# Altium PCB ST_Link.PcbDoc
Units mm, origin at the board's own origin, x right, y up, seen from the top; angles counter-clockwise.
Board outline 28.77 x 54.15 mm, 2 copper layers (Top Layer, Bottom Layer), stack 1.671 mm thick; 41 components, 37 nets, 179 pads, 48 vias.
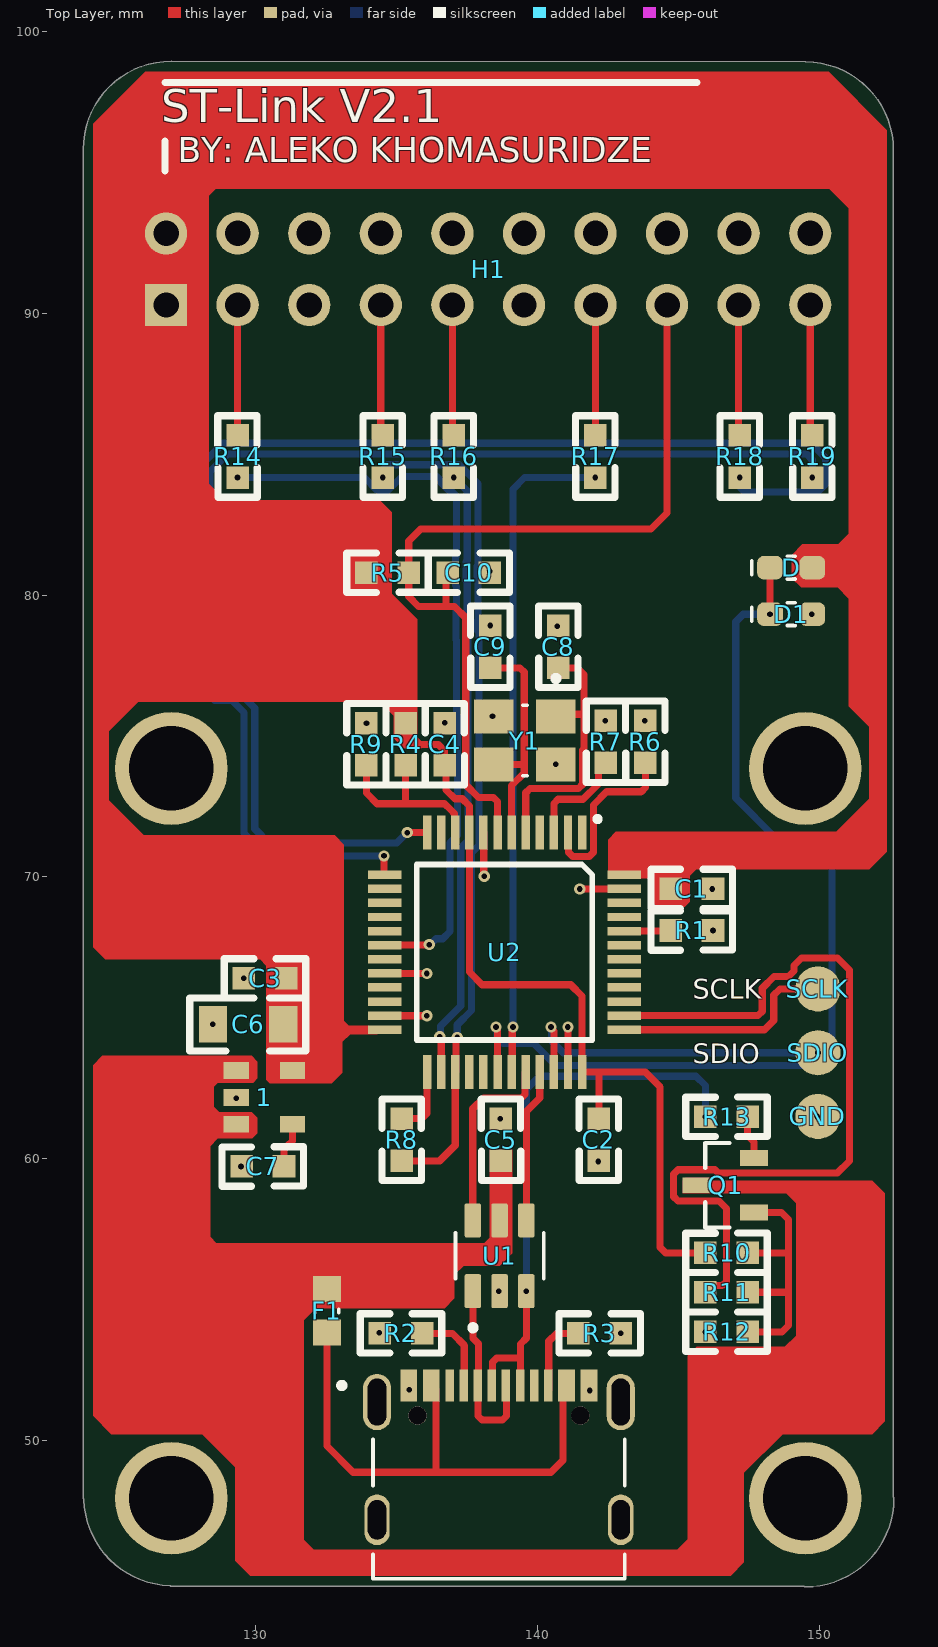
[diagram p0: Top Layer view]
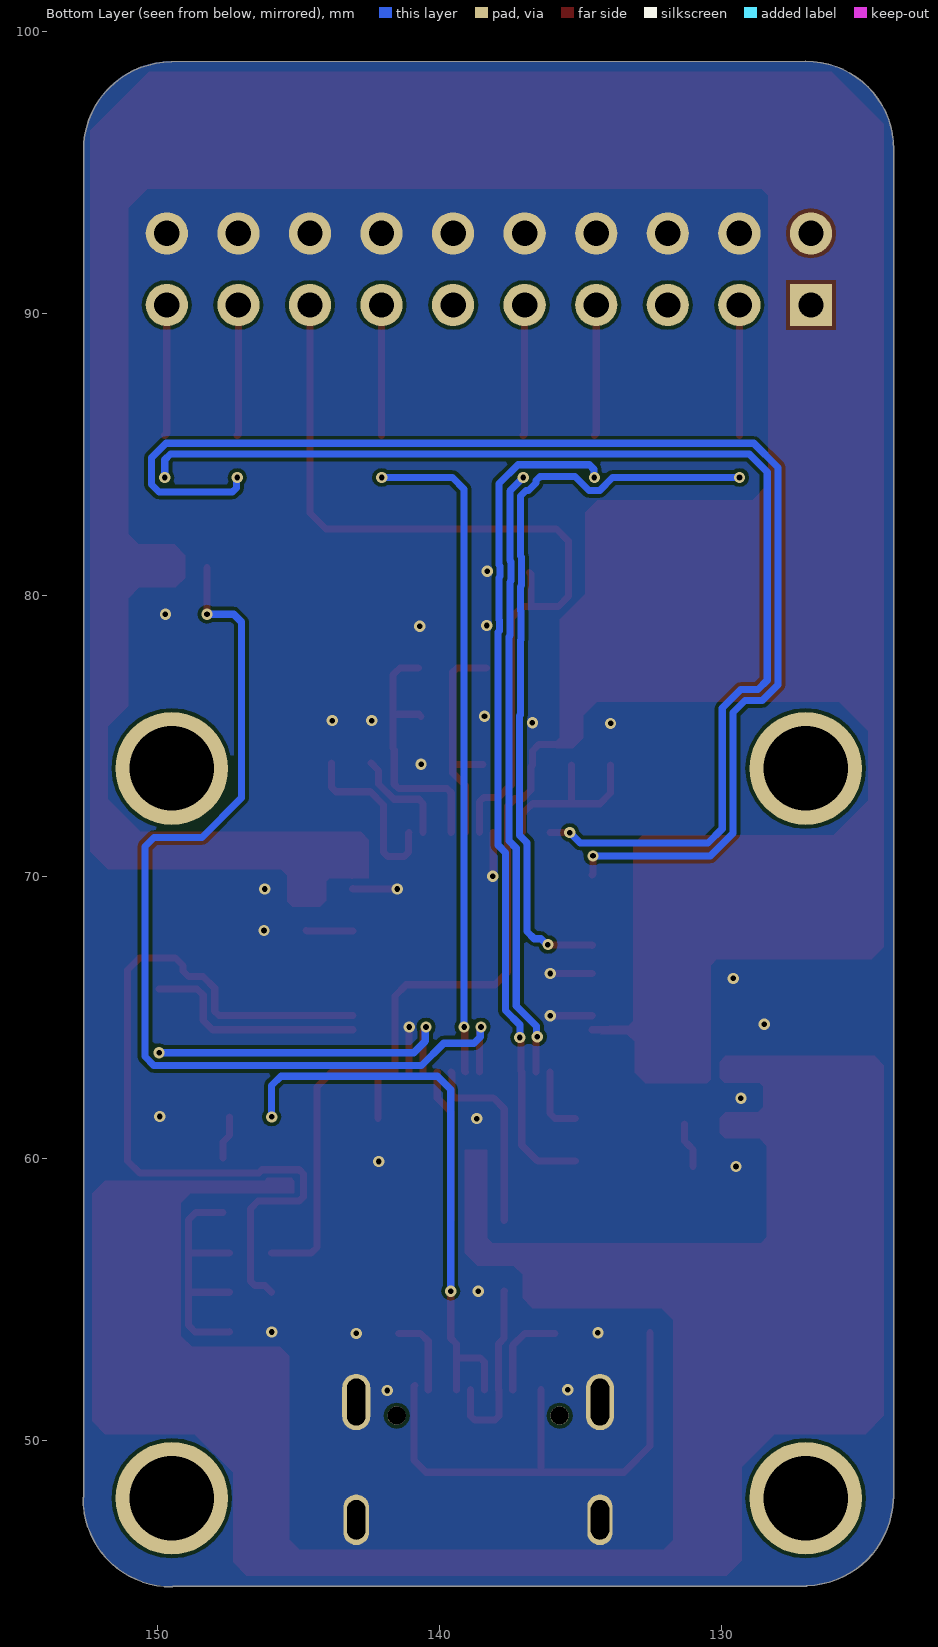
[diagram p1: Bottom Layer view, seen from below]
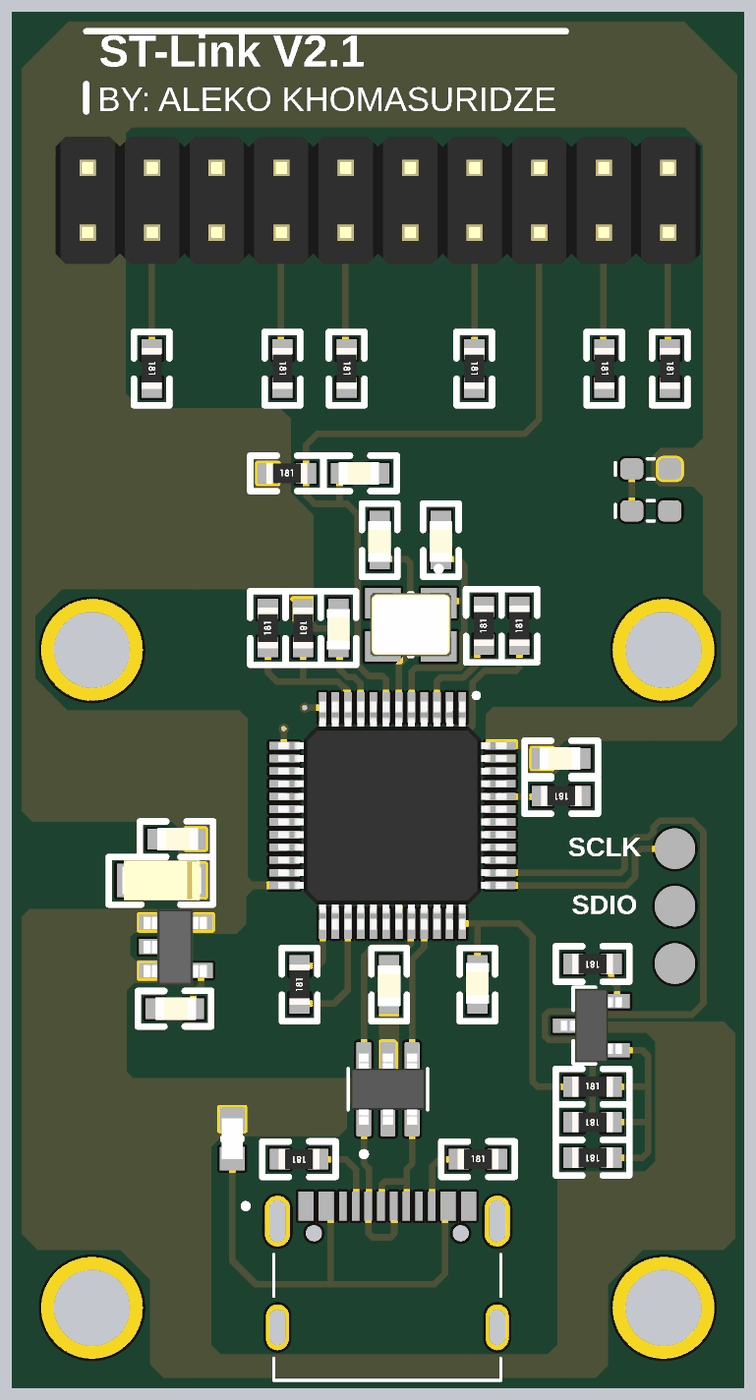
[diagram p2: 3D render of the assembled board from above, using the file's embedded part models]

## Layer stack, top to bottom
Top Solder: solder mask 0.0102, Solder Resist, Dk 3.5
Top Layer: signal copper 0.0356
Dielectric 1: dielectric 1.6, FR-4, Dk 4.8
Bottom Layer: signal copper 0.0356
Bottom Solder: solder mask 0.0102, Solder Resist, Dk 3.5

## Board outline
123.901,47.897 cw(c124,47.977) 123.873,47.977 123.873,95.825 cw(c124,95.825) 123.873,95.826 cw(c127,95.825) 127,98.952 cw(c127,98.825) 127.018,98.951 149.5,98.929 cw(c149.5,98.802) 149.521,98.927 cw(c149.5,95.8) 152.627,95.8 cw(c152.5,95.8) 152.627,95.799 152.627,47.996 cw(c152.516,47.934) 152.643,47.934 cw(c149.516,47.934) 149.516,44.807 cw(c149.516,44.934) 149.454,44.823 127.027,44.823 cw(c127.027,44.95) 126.947,44.851 cw(c127.027,47.977)

## Design rules (kind name [scope] priority, off if disabled: settings)
Clearance [All] p1: gap=0.127 ignorepadtopadclearanceinfootprint=FALSE except(0: Arc-Hole Track-Hole SMDPad-Hole THPad-Hole Via-Hole Fill-Hole Poly-Hole Region-Hole Text-Hole)
PolygonConnect [All] p1: connectstyle=Direct reliefconductorwidth=0.254 reliefentries=4 polygonreliefangle="90 Angle" airgapwidth=0.254
RoutingVias [All] p1: holewidth=0.711 width=1.27 viastyle="Through Hole" minholewidth=0.711 minwidth=1.27 maxholewidth=0.711 maxwidth=1.27
SolderMaskExpansion [All] p1: expansion=0.102 istentingtop=FALSE
Width [All] p1: maxlimit=0.254 minlimit=0.254 preferedwidth=0.254
30 further rules are at their usual default settings.

## Components (designator, comment, footprint, x,y, rotation, side; value= is the part's Value field where it differs from the comment)
1 "3.3v reg" "3.3v reg" 129.3,63.125 r270 top
C1 "100nf" "0603 CAP" 146.225,69.575 r180 top
C2 "100nf" "0603 CAP" 142.175,59.925 r90 top
C3 "100nf" "0603 CAP" 129.575,66.4 r0 top
C4 "0603 CAP" "0603 CAP" 136.7,75.463 r270 top
C5 "0603 CAP" "0603 CAP" 138.7,61.425 r270 top
C6 "2.2uF TAN CAP" "2.2uF TAN CAP" 130.975,64.775 r180 top
C7 "0603 CAP" "0603 CAP" 129.5,59.725 r0 top
C8 "22pf" "0603 CAP" 140.737,78.921 r270 top
C9 "22pf" "0603 CAP" 138.324,78.921 r270 top
C10 "100nf" "0603 CAP" 138.307,80.8 r180 top
D "BLUE" LEDSC160X80X70L45N 149,80.975 r0 top
D1 "GREEN" LEDSC160X80X70L45N 149,79.325 r0 top
F1 "0686F1500-01" FUSC1608X60N 132.525,54.6 r90 top
GND "PAD" PAD 149.95,61.5 r0 top
H1 "2x10 male header" "2x10 MALE HEADER - duplicate" 126.815,90.3 r90 top
Q1 "SOT23 PNP transistor" PCBComponent_1 147.816,60.598 r180 top
R1 "100k" "0603 RES" 144.725,68.1 r0 top
R2 "5.1k" "0603 RES" 134.4,53.8 r0 top
R3 "5.1k" "0603 RES" 142.95,53.8 r180 top
R4 "4k7" "0603 RES" 135.314,73.963 r90 top
R5 "100k" "0603 RES" 135.425,80.8 r180 top
R6 "10k" "0603 RES" 143.825,75.55 r270 top
R7 "10k" "0603 RES" 142.425,75.55 r270 top
R8 "100R" "0603 RES" 135.175,61.425 r270 top
R9 "4k7" "0603 RES" 133.925,75.463 r270 top
R10 "10k" "0603 RES" 147.455,56.66 r180 top
R11 "100R" "0603 RES" 145.955,55.26 r0 top
R12 "36k" "0603 RES" 145.955,53.86 r0 top
R13 "1k5" "0603 RES" 145.955,61.485 r0 top
R14 "22R" "0603 RES" 129.35,84.175 r90 top
R15 "22R" "0603 RES" 134.5,84.175 r90 top
R16 "22R" "0603 RES" 137.025,84.175 r90 top
R17 "22R" "0603 RES" 142.05,84.175 r90 top
R18 "" "0603 RES" 147.175,84.175 r90 top
R19 "22R" "0603 RES" 149.75,84.175 r90 top
SCLK "PAD" PAD 149.95,66.025 r0 top
SDIO "PAD" PAD 149.95,63.762 r0 top
U1 "USBLC6-2SC6" SOT95P280X145-6N 138.65,56.555 r90 top
U2 "STM32F103C8T6" STM32F103C8T6 141.578,71.579 r270 top
Y1 "7M25090002" XTAL_7M25090002 139.551,74.842 r270 top

## Footprints (in the part's own frame and the unit in brackets; to place one, negate y for a bottom-side part, rotate by r counter-clockwise, add the part's x,y. Pads: shape width x height; smd on the part's side, far side on the other; paste and mask are expansions set on the pad)
"2.2uF TAN CAP" [mm]
  rect 1x1.3 smd: 1(0,0) 2(2.5,0)
  silkscreen extent -0.79,-0.93 3.32,0.95, body extent -0.33,-0.8 2.77,0.8, height 1.31
"2x10 MALE HEADER - duplicate" [mm]
  rect 1.5x1.5 hole 0.9: 1(0,0)
  round 1.5 hole 0.9: 2(0,-2.54) 3(0,-5.08) 4(0,-7.62) 5(0,-10.16) 6(0,-12.7) 7(0,-15.24) 8(0,-17.78) 9(0,-20.32) 10(0,-22.86) 11(2.54,-22.86) 12(2.54,-20.32) 13(2.54,-17.78) 14(2.54,-15.24) 15(2.54,-12.7) 16(2.54,-10.16) 17(2.54,-7.62) 18(2.54,-5.08) 19(2.54,-2.54) 20(2.54,0)
  body extent -1.25,-24.14 3.75,1.26, height 10.54
"3.3v reg" [mm]
  rect 0.6x0.9 smd: 1(0,0) 2(0.95,0) 3(1.9,0) 4(1.9,2) 5(0,2)
  body extent -0.52,-0.27 2.48,2.23, height 1.1
"0603 CAP" [mm]
  rect 0.8x0.8 smd: 1(0,0) 2(1.5,0)
  silkscreen extent -0.7,-0.7 2.2,0.7, body extent 0,-0.45 1.6,0.45, height 0.8
"0603 RES" [mm]
  rect 0.8x0.8 smd: 1(0,0) 2(1.5,0)
  silkscreen extent -0.7,-0.7 2.2,0.7, body extent -0.05,-0.4 1.55,0.4, height 0.45
FUSC1608X60N [mm]
  rect 0.92x0.99 smd: 1(-0.775,0) 2(0.775,0)
  silkscreen extent -0.06,-0.41 0.06,0.41, body extent -0.8,-0.41 0.8,0.41, height 0.6
LEDSC160X80X70L45N [mm]
  rrect53% 0.91x0.83 smd: A(0.75,0) C(-0.75,0)
  silkscreen extent -1.4,-0.4 0.14,0.4
PAD [mm]
  round 1.6 smd: 1(0,0)
PCBComponent_1 [mm]
  rect 1x0.559 smd: 1(0.139,2.504) 2(0.139,0.574) 3(2.171,1.539)
  silkscreen extent 1,0.04 1.87,3.04, body extent -0.04,0.09 2.36,2.99, height 1.15
SOT95P280X145-6N [mm]
  rrect25% 1.21x0.59 smd: 1(-1.255,0.95) 2(-1.255,0) 3(-1.255,-0.95) 4(1.255,-0.95) 5(1.255,0) 6(1.255,0.95)
  silkscreen extent -2.65,-1.57 0.81,1.57, body extent -1.4,-1.46 1.4,1.46, height 1.4
STM32F103C8T6 [mm]
  rect 1.2x0.3 smd: 1(0,0) 2(0,-0.5) 3(0,-1) 4(0,-1.5) 5(0,-2) 6(0,-2.5) 7(0,-3) 8(0,-3.5) 9(0,-4) 10(0,-4.5) 11(0,-5) 12(0,-5.5) 25(8.5,-5.5) 26(8.5,-5) 27(8.5,-4.5) 28(8.5,-4) 29(8.5,-3.5) 30(8.5,-3) 31(8.5,-2.5) 32(8.5,-2) 33(8.5,-1.5) 34(8.5,-1) 35(8.5,-0.5) 36(8.5,0)
  rect 0.3x1.2 smd: 13(1.5,-7) 14(2,-7) 15(2.5,-7) 16(3,-7) 17(3.5,-7) 18(4,-7) 19(4.5,-7) 20(5,-7) 21(5.5,-7) 22(6,-7) 23(6.5,-7) 24(7,-7) 37(7,1.5) 38(6.5,1.5) 39(6,1.5) 40(5.5,1.5) 41(5,1.5) 42(4.5,1.5) 43(4,1.5) 44(3.5,1.5) 45(3,1.5) 46(2.5,1.5) 47(2,1.5) 48(1.5,1.5)
  silkscreen extent -0.53,-5.86 7.36,0.61, body extent -0.25,-7.25 8.75,1.75, height 1.6
XTAL_7M25090002 [mm]
  rect 1.2x1.4 smd: 1(-0.85,1.1) 2(-0.85,-1.1) 3(0.85,-1.1) 4(0.85,1.1)
  silkscreen extent -2.3,-0.08 1.25,1.2, body extent -1.25,-1.6 1.25,1.6, height 0.8

## Part data
C1 C2 C3 C8 C9 C10: library part "0603 CAP"
D D1: library part 597-3326-607F, "Green 525nm LED Indication - Discrete 3.4V 0603 _1608 Metric_", Package="0603 Dialight", Digi-Key_Part_Number=5973326607F-ND, Digi-Key_Purchase_URL=https://www.digikey.com/product-detail/en/dialight/5973326607F/5973326607F-ND/2432552?utm_source=snapeda&utm_medium=aggregator&utm_campaign=symbol, MF=Dialight, MP=597-3326-607F, SnapEDA_Link=https://www.snapeda.com/parts/597-3326-607F/Dialight/view-part/473703/?ref=snap
F1: "0603 SMT Fuse", Package="0603 Bel Fuse Inc.", Availability=Warning, MF="Bel Fuse", MP=0686F1500-01, Price=None, Purchase-URL=https://pricing.snapeda.com/search/part/0686F1500-01/?ref=eda, SnapEDA_Link=https://www.snapeda.com/parts/0686F1500-01/Bel%20Fuse/view-part/4616395/?ref=snap
H1: "2.54mm pitch 2x10 male header"
Q1: library part BC857
R1 R2 R3 R4 R5 R6 R7 R8 R9 R10 R11 R12 R13 R14 R15 R16 R17 R18 R19: library part "0603 RES"
U1: "17V Clamp 5A (8/20Âµs) Ipp Tvs Diode Surface Mount SOT-23-6", Package="SOT-23-6 STMicroelectronics", Availability="In Stock", Check_prices=https://www.snapeda.com/parts/USBLC6-2SC6/STMicroelectronics/view-part/?ref=eda, MF=STMicroelectronics, MP=USBLC6-2SC6, Price=None, Purchase-URL=https://pricing.snapeda.com/search/part/USBLC6-2SC6/?ref=eda, SnapEDA_Link=https://www.snapeda.com/parts/USBLC6-2SC6/STMicroelectronics/view-part/?ref=snap
Y1: "25 MHz Â±10ppm Crystal 18pF 4-SMD, No Lead", Package="SMD-4 TXC", Availability="In Stock", Check_prices=https://www.snapeda.com/parts/7M25090002/TXC/view-part/?ref=eda, MF=TXC, MP=7M25090002, Price=None, Purchase-URL=https://pricing.snapeda.com/search/part/7M25090002/?ref=eda, SnapEDA_Link=https://www.snapeda.com/parts/7M25090002/TXC/view-part/?ref=snap

## Free pads (board coordinates)
  round 4 hole 3: 28(127,47.95) 28(127,73.85) 28(149.5,47.95) 28(149.5,73.85)
  rect 0.3x1.14 smd: A1(135.277,51.954) A4(136.077,51.954) A5(137.377,51.954) A6(138.377,51.954) A7(138.877,51.954) A8(139.877,51.954) A9(141.177,51.954) A12(141.977,51.954) B1(141.677,51.954) B4(140.877,51.954) B5(140.377,51.954) B6(139.377,51.954) B7(137.877,51.954) B8(136.877,51.954) B9(136.377,51.954) B12(135.577,51.954)
  oval 1x2 hole 0.65 slot 1.66 at 90 deg: S1(134.302,51.364) S2(142.952,51.364)
  oval 0.9x1.8 hole 0.65 slot 1.4 at 90 deg: S3(134.302,47.184) S4(142.952,47.184)
  round 0.65 hole 0.65 unplated: ""(135.737,50.884) ""(141.517,50.884)

## Via types
v1: diameter 0.4, hole 0.2, Top Layer to Bottom Layer, tented both sides, 48 vias

## Nets (pads, with @x,y where several pads share a name; then routed paths per layer and width w, separated by ;. In a path a pad name is that pad's centre, name@x,y a point inside that pad or via, vN(x,y) a via of type N, cw(c..) or ccw(c..) an arc to the next point about the centre after c; other vN are vias at no path point)
3.3v: 1.5 C1.2 C2.2 C3.2 C4.2 C6.1 D.A H1.1 H1.20 R4.2 R5.2 R10.2 U2.9 U2.24 U2.36 U2.48 | length 154.6
  Top Layer w0.254: H1.1 124.6,90.3 124.575,90.325 ; H1.20 126.73,92.925 124.575,92.925 ; C6.1 132.921,64.775 ; C3.2 132.921,66.4 ; 1.5 132.55,63.125 132.921,63.496 132.921,64.579 ; U2.24 132.921,64.579 ; C2.2 142.175,63.004 142.1,63.079 ; U2.48 143.101,70.056 143.104,70.056 143.15,70.102 143.15,70.925 143.625,71.4 144.725,71.4 ; C1.2 144.725,71.4 ; R10.2 144.54,56.66 144.35,56.85 144.35,62.547 143.818,63.079 142.1,63.079 ; D.A 149.812,80.913 151.925,80.913 151.925,95.739 149.839,97.825 126.998,97.825 124.575,95.402 124.575,92.925 ; 151.925,72.3 151.025,71.4 144.725,71.4 ; 124.575,80.9 124.575,80.8 124.575,68.948 125.548,67.975 132.45,67.975 132.921,67.504 132.921,66.4 ; 124.575,80.9 124.575,90.325 ; 124.575,80.9 124.675,80.8 R5.2 133.925,78.275 134.625,77.575 134.975,77.575 135.35,77.2 135.35,75.499 R4.2 135.325,75.452 135.325,74.875 135.5,74.7 136.475,74.7 136.7,74.475 C4.2 136.75,73.913 136.75,73.089 137.064,72.775 137.325,72.775 137.578,72.522 U2.9 137.578,66.622 138.025,66.175 141.175,66.175 141.578,65.772 U2.36 142.1,63.079 ; 124.575,90.325 124.575,92.925 ; 132.921,64.579 132.921,64.775 ; 132.921,64.775 132.921,66.4
+5v: 1.1 1.3 C5.2 F1.2 Q1.3 U1.5 | length 71.4
  Top Layer w0.254: 1.3 128.075,61.225 128,61.15 ; 1.1 128.33,63.125 128,62.795 128,61.15 ; F1.2 132.525,56.575 ; C5.2 138.65,59.875 U1.5 138.65,56.845 138.396,56.59 132.525,56.59 128,56.59 ; Q1.3 149.49,59.06 149.925,58.625 149.925,51.225 149.35,50.65 148.712,50.65 147.004,48.942 147.004,46.465 146.063,45.525 130.26,45.525 129.55,46.235 129.55,49.225 128,50.775 128,56.59 ; 128,56.59 128,61.15
AIN: R4.1 R9.2 U2.10 | length 6.5
  Top Layer w0.254: R9.2 133.925,72.975 134.3,72.6 135.314,72.6 136.7,72.6 136.906,72.394 137.055,72.245 137.055,71.602 U2.10 ; R4.1 135.314,72.66 135.374,72.6
BOOT0: R1.1 U2.44 | length 1.7
  Top Layer w0.254: U2.44 144.704,68.079 R1.1
DN: pad.A7 pad.B7 U1.1 | length 6.6
  Top Layer w0.254: U1.1 137.704,55.296 137.704,53.628 137.898,53.434 137.898,51.803 137.889,51.794 137.889,50.874 138.037,50.725 138.749,50.725 138.898,50.874 pad.A7@138.898,51.803
DP: pad.A6 pad.B6 R13.1 U1.3 | length 20.6
  Top Layer w0.254: pad.A6@138.398,51.803 138.398,52.777 138.547,52.926 139.398,52.926 ; pad.B6@139.398,51.803 139.398,52.926 ; v1(139.6,55.3) 139.6,53.625 139.398,53.423 139.398,52.926
  Bottom Layer w0.254: v1(139.6,55.3) 139.6,62.455 140.072,62.927 145.625,62.927 145.955,62.597 v1(145.955,61.485)
GND: 1.2 C1.1 C2.1 C3.1 C4.1 C5.1 C6.2 C7.1 C8.1 C9.1 C10.1 D1.A GND.1 H1.11 H1.12 H1.13 H1.14 H1.15 H1.16 H1.17 H1.18 H1.19 pad.A1 pad.A12 pad.B1 pad.B12 pad.S1 pad.S2 pad.S3 pad.S4 R1.2 R2.1 R3.1 R6.1 R7.1 R9.1 R12.1 U1.2 U2.8 U2.20 U2.23 U2.35 U2.47 Y1.2 Y1.4 | length 7.7
  Top Layer w0.254: U2.23 134.58,65.077 136.069,65.077 v1(136.071,65.075) ; U2.20 134.58,66.577 136.069,66.577 v1(136.071,66.575) ; U2.8 138.089,71.568 138.089,70.042 v1(138.106,70.025) ; v1(141.075,64.675) 141.076,64.674 141.076,63.081 U2.35 ; v1(141.5,69.575) 141.502,69.577 143.076,69.577 U2.47
  other v1: 141.85,51.775 135.45,51.8 142.95,53.8 134.375,53.825 145.95,53.85 138.625,55.3 129.475,59.725 142.15,59.9 138.675,61.425 149.925,61.5 129.3,62.15 128.475,64.775 129.575,66.4 146.225,68.1 146.2,69.575 140.65,74 133.925,75.45 136.7,75.475 142.4,75.55 143.8,75.55 138.4,75.7 140.7,78.9 138.325,78.925 149.725,79.325 138.3,80.85
LED: D1.C D.C U2.30 | length 35.3
  Top Layer w0.254: v1(138.525,64.675) 138.525,64.635 138.578,64.582 U2.30 ; v1(148.25,79.325) D.C
  Bottom Layer w0.254: v1(138.525,64.675) 138.553,64.647 138.553,64.322 138.775,64.1 139.85,64.1 140.641,63.308 150.138,63.308 150.453,63.624 150.453,71.078 150.128,71.403 148.425,71.403 147.03,72.798 147.03,79.055 147.3,79.325 v1(148.25,79.325)
Net1_4: 1.4 C7.2 | length 1.6
  Top Layer w0.254: C7.2 131,60.326 131.149,60.475 131.151,60.475 131.3,60.624 1.4
NetC8_2: C8.2 U2.5 Y1.1 | length 9.5
  Top Layer w0.254: U2.5 139.578,72.989 139.727,73.138 141.456,73.138 141.605,73.287 141.605,74.508 141.65,74.553 141.65,75.775 ; Y1.1 140.734,75.775 141.65,75.775 ; C8.2 141.404,77.421 141.575,77.25 ; 141.576,77.249 141.65,77.175 141.65,75.775
NetC9_2: C9.2 U2.6 Y1.3 | length 8.2
  Top Layer w0.254: C9.2 139.376,77.421 139.525,77.272 139.525,73.975 ; Y1.3 139.508,73.992 139.525,73.975 ; U2.6 139.078,73.244 139.525,73.691 139.525,73.975
NetF1_1: F1.1 pad.A4 pad.A9 pad.B4 pad.B9 | length 18.5
  Top Layer w0.254: F1.1 132.525,49.8 133.45,48.875 136.4,48.875 ; pad.B9@136.398,51.803 136.398,48.877 136.4,48.875 ; pad.B4 140.898,51.933 140.898,49.298 140.475,48.875 136.4,48.875
NetH1_2: H1.2 R14.2 | length 4.6
  Top Layer w0.254: R14.2 129.355,85.68 H1.2
NetH1_4: H1.4 R15.2 | length 4.7
  Top Layer w0.254: H1.4 134.435,85.74 R15.2
NetH1_5: H1.5 R16.2 | length 4.6
  Top Layer w0.254: H1.5 136.975,85.725 R16.2
NetH1_7: H1.7 R17.2 | length 4.6
  Top Layer w0.254: R17.2 142.055,85.68 H1.7
NetH1_9: H1.9 R18.2 | length 4.6
  Top Layer w0.254: H1.9 147.135,85.715 R18.2
NetH1_10: H1.10 R19.2 | length 4.7
  Top Layer w0.254: H1.10 149.675,85.75 R19.2
NetJ1_A5: pad.A5 R2.2 | length 3.2
  Top Layer w0.254: R2.2 136.975,53.8 137.398,53.377 pad.A5@137.398,51.803
NetJ1_B5: pad.B5 R3.2 | length 2.9
  Top Layer w0.254: pad.B5@140.398,51.803 140.398,53.523 140.675,53.8 R3.2
NetQ1_1: Q1.1 R10.1 R11.2 R12.2 | length 9.5
  Top Layer w0.254: R12.2 147.465,53.85 148.674,53.85 148.9,54.076 148.9,55.363 148.9,56.725 ; R11.2 148.797,55.26 ; R10.1 148.835,56.66 148.9,56.725 ; Q1.1 148.651,58.094 148.9,57.846 148.9,56.725
NetQ1_2: Q1.2 R13.2 | length 1.6
  Top Layer w0.254: R13.2 147.45,61.479 147.45,60.825 147.677,60.598 Q1.2
NetR6_2: R6.2 U2.2 | length 6.4
  Top Layer w0.254: U2.2 141.101,71.556 141.101,70.874 141.25,70.725 141.833,70.725 141.982,70.874 141.982,72.557 142.45,73.025 143.675,73.025 143.825,73.175 R6.2
NetR7_2: R7.2 U2.3 | length 3.8
  Top Layer w0.254: U2.3 140.578,72.608 140.727,72.757 141.614,72.757 142.158,73.301 142.158,73.783 R7.2
NetR8_1: R8.1 U2.25 | length 2.5
  Top Layer w0.254: R8.1 135.9,61.425 136.078,61.603 U2.25
NRST: C10.2 H1.8 R5.1 U2.7 | length 30.9
  Top Layer w0.254: C10.2 136.75,80.743 136.75,79.6 ; U2.7 138.578,72.676 138.429,72.825 137.9,72.825 137.45,73.275 137.45,79.2 137.05,79.6 136.75,79.6 ; H1.8 144.595,82.922 144.023,82.35 135.85,82.35 135.425,81.925 R5.1 135.425,79.95 135.775,79.6 136.75,79.6
RENUM: R11.1 U2.38 | length 29.3
  Top Layer w0.254: U2.38 147.826,65.079 147.975,65.228 147.975,66.052 148.393,66.47 148.905,66.47 149.1,66.666 149.1,66.858 149.371,67.129 150.644,67.129 151.071,66.702 151.071,59.924 150.638,59.491 146.409,59.491 146.289,59.611 144.978,59.611 144.829,59.462 144.829,58.649 144.978,58.5 146.435,58.5 146.699,58.236 146.699,55.644 146.55,55.495 146.191,55.495 R11.1
S_CLK: SCLK.1 U2.37 | length 8
  Top Layer w0.254: U2.37 148.054,64.579 148.381,64.906 148.381,65.806 148.6,66.025 SCLK.1
S_DIO: SDIO.1 U2.34 | length 11.8
  Top Layer w0.254: v1(140.475,64.675) 140.475,64.635 140.578,64.532 U2.34
  Bottom Layer w0.254: v1(140.475,64.675) 140.503,64.647 140.503,64.172 140.912,63.762 v1(149.95,63.762)
T_CLK: R16.1 U2.26 | length 21.8
  Top Layer w0.254: v1(136.525,64.325) 136.525,64.285 136.578,64.232 U2.26
  Bottom Layer w0.254: v1(136.525,64.325) 136.553,64.353 136.553,64.699 137.271,65.417 137.271,71.018 137.535,71.282 137.535,78.534 137.49,78.579 137.49,79.271 137.501,79.282 137.501,80.468 137.465,80.504 137.465,81.196 137.501,81.232 137.501,83.699 v1(137.025,84.175)
T_DIO: R8.2 R15.1 U2.27 | length 30
  Top Layer w0.254: R8.2 136.525,59.925 137.078,60.478 U2.27 137.101,63.102 137.101,64.259 v1(137.146,64.304)
  Bottom Layer w0.254: v1(134.5,84.175) 134.519,84.194 134.519,84.469 134.679,84.629 137.213,84.629 137.882,83.96 137.882,81.074 137.846,81.038 137.846,80.662 137.882,80.626 137.882,79.124 137.871,79.113 137.871,78.737 137.916,78.692 137.916,71.124 137.652,70.861 137.652,65.259 137.146,64.753 v1(137.146,64.304)
T_RST: R14.1 U2.18 | length 26.6
  Top Layer w0.254: U2.18 134.589,67.59 136.14,67.59 v1(136.15,67.6)
  Bottom Layer w0.254: v1(129.35,84.175) 133.858,84.175 134.312,83.721 134.688,83.721 135.183,84.216 136.422,84.216 136.571,84.068 136.571,83.987 136.837,83.721 136.924,83.721 137.12,83.525 137.12,81.389 137.084,81.354 137.084,80.346 137.12,80.311 137.12,79.439 137.109,79.429 137.109,78.421 137.12,78.411 137.12,75.758 137.154,75.724 137.154,71.479 136.9,71.225 136.9,71.186 136.89,71.176 136.89,68.065 136.633,67.808 136.397,67.808 136.19,67.6 v1(136.15,67.6)
T_RX: R18.1 U2.13 | length 47.3
  Top Layer w0.254: v1(134.55,70.747) 134.55,70.102 134.573,70.079 U2.13
  Bottom Layer w0.254: v1(134.55,70.747) 130.386,70.747 129.58,71.553 129.58,75.837 129.153,76.265 128.542,76.265 127.986,76.821 127.986,84.534 128.843,85.391 149.707,85.391 150.216,84.881 150.216,83.925 149.95,83.659 147.352,83.659 147.203,83.807 147.203,84.147 v1(147.175,84.175)
T_SWO: R17.1 U2.31 | length 23.8
  Top Layer w0.254: U2.31 139.101,63.102 139.101,64.651 v1(139.125,64.675)
  Bottom Layer w0.254: v1(139.125,64.675) 139.125,83.76 139.54,84.175 v1(142.05,84.175)
T_TX: R19.1 U2.12 | length 42.5
  Top Layer w0.254: v1(135.375,71.575) 136.074,71.575 U2.12
  Bottom Layer w0.254: v1(135.375,71.575) 135.001,71.201 130.471,71.201 129.961,71.71 129.961,75.995 129.308,76.649 128.697,76.649 128.367,76.979 128.367,84.376 129.001,85.01 149.549,85.01 149.75,84.809 v1(149.75,84.175)
USB_N: U1.6 U2.32 | length 6.8
  Top Layer w0.254: U1.6 137.7,61.775 138.075,62.15 139.425,62.15 139.555,62.28 139.555,63.056 U2.32
USB_P: U1.4 U2.33 | length 5.5
  Top Layer w0.254: U1.4 139.6,61.675 140.078,62.153 U2.33
pads on no net: H1.3 H1.6 U2.1 U2.4 U2.11 U2.14 U2.15 U2.16 U2.17 U2.19 U2.21 U2.22 U2.28 U2.29 U2.39 U2.40 U2.41 U2.42 U2.43 U2.45 U2.46

## Polygon pours and split planes (outlines as drawn)
GND on Bottom Layer "NONET_L-01_P-001" (solid, pour order 0): 123.875,95.827 cw(c126.998,95.827) 126.998,98.95 149.499,98.95 cw(c149.499,95.824) 152.625,95.824 152.625,47.916 cw(c149.534,47.916) 149.534,44.825 127.15,44.825 cw(c127.15,48.1) 123.875,48.1

## Other copper
Top Layer:
  region net 3.3v: 134.4,76.225 134.9,75.725 134.9,74.925 135.25,74.575 135.863,74.575 135.988,74.7 135.725,74.963 135.725,79.15 134.825,80.05 134.825,81.225 134.825,82.95 134.4,83.375 128.9,83.375 128.325,83.95 128.325,94.175 128.575,94.425 150.35,94.425 151.05,93.725 151.05,82.175 150.675,81.8 149.4,81.8 149.025,81.425 149.025,80.6 149.35,80.275 150.65,80.275 151.05,79.875 151.05,76.05 151.775,75.325 151.775,72.775 150.6,71.6 142.775,71.6 142.5,71.325 142.5,69.95 143.9,69.95 144.025,69.825 144.025,69.15 144.225,68.95 145.225,68.95 145.4,69.125 145.4,70.05 145.625,70.275 151.775,70.275 152.4,70.9 152.4,96.5 150.325,98.575 126.075,98.575 124.225,96.725 124.225,81.675 124.225,67.5 124.65,67.075 130.15,67.075 130.375,66.85 130.375,62.8 130.5,62.675 132.7,62.675 133.075,63.05 133.075,64.15 133.35,64.425 134.3,64.425 133.992,64.727 133.298,64.727 133.125,64.9 133.125,71.15 132.8,71.475 126.025,71.475 124.775,72.725 124.775,75.175 125.825,76.225
  region: 134.9,81.45
  region: 133.975,64.725
  region net +5v: 138.3,60.325 138.3,57.2 138.1,57 128.6,57 128.375,57.225 128.375,60.45 128.65,60.725 129.875,60.725 130.05,60.9 130.05,61.45 129.85,61.65 128.7,61.65 128.5,61.85 128.5,62.55 128.65,62.7 129.9,62.7 130.05,62.85 130.05,63.45 129.85,63.65 124.55,63.65 124.225,63.325 124.225,50.875 124.875,50.225 128.1,50.225 129.275,49.05 129.275,45.725 129.8,45.2 146.85,45.2 147.325,45.675 147.325,48.85 148.7,50.225 151.875,50.225 152.325,50.675 152.325,58.775 151.875,59.225 146.225,59.225 146.125,59.325 145.25,59.325 145.15,59.225 145.15,58.775 146.125,58.775 148.825,58.775 149.175,58.425 149.175,53.725 148.775,53.325 145.65,53.325 145.325,53 145.325,46.5 144.95,46.125 132.05,46.125 131.7,46.475 131.7,54.275 132.125,54.7 136.7,54.7 137.05,55.05 137.05,55.875 137.375,56.2 138.65,56.2 139.1,56.65 139.1,60.325

## Silkscreen, mask and mechanical layers (free items; w line width, h text height)
Top Overlay:
  circle w0.2: c133.052,51.954 r0.1
  lines w0.127: 134.157,45.954 134.157,45.094 143.097,45.094 143.097,45.954 ; 134.157,48.404 134.157,50.044 ; 143.097,48.404 143.097,50.044
  lines w0.254: 126.775,95.05 126.775,96.125 ; 126.775,98.2 145.65,98.2
  text "ST-Link V2.1" at 126.65,96.4 h2
  text "BY: ALEKO KHOMASURIDZE" at 127.225,95.067 h1.52
  text "SCLK" at 145.5,65.439 h1.2
  text "SDIO" at 145.5,63.164 h1.2
Mechanical 1:
  lines w0: 142.627,50.813 ccw(c142.937,50.824) 142.948,50.514 ; 142.627,50.814 142.627,51.864 ; 142.627,51.861 cw(c142.962,51.879) 142.944,52.214 cw(c142.962,51.899) 143.277,51.915 ; 142.945,50.514 ccw(c142.962,50.829) 143.277,50.812 ; 143.277,50.814 143.277,51.914
  lines w0.254: 124,47.977 124,95.825 cw(c127,95.825) 127,98.825 ; 124.027,47.977 ccw(c127.027,47.977) 127.027,44.977 ; 127,98.824 149.5,98.802 ; 134.175,44.95 127.027,44.95 149.516,44.95 ; 149.5,98.8 cw(c149.5,95.8) 152.5,95.8 152.5,47.934 ; 149.516,44.934 ccw(c149.516,47.934) 152.516,47.934
Mechanical 13:
  circle w0.2: c133.052,51.954 r0.1
  lines w0.127: 133.157,45.094 144.097,45.094 ; 134.157,44.604 134.157,51.954 143.097,51.954 143.097,44.604 134.157,44.604
  text "PCB Edge" at 136.557,45.354 h0.7
Mechanical 15:
  lines w0.05: 133.552,44.354 133.552,52.774 143.702,52.774 143.702,44.354 133.552,44.354